# EAGLE board Bodacious Gogo (EAGLE 9.7.0)

Size 200.59 x 126.76 mm. Coordinates in mm from the lower left corner, seen from the top.
Outline: 0,0 200.59,0 200.59,126.76 0,126.76 0,0
Copper layers (1*16): Top 0.035mm / dielectric 1.5mm / Bottom 0.035mm
Design rules "default": minimum track width 6mil, minimum drill 0.35mm, track to track 6mil, track to pad 6mil, pad to pad 6mil, via to via 6mil, smd to smd 6mil, copper to edge 40mil, drill to drill 6mil, minimum pad ring 10mil, minimum via ring 8mil, stop-mask expansion 4mil, vias tented up to drill 0mil, thermal gap 10mil

## Footprints (pad centres in the part's own frame; a part is rotated, then mirrored left to right if it is on the bottom)
BATTERY-GENERIC = drill 1.118 pad 3.15 octagon: + 2.54,0; - -2.54,0
MOTOR = drill 1.118 pad 3.15 octagon: + 2.54,0; - -2.54,0
DIP762W53P254L1969H508Q16B = drill 0.743 pad 1.343: 1 -3.81,8.89; 2 -3.81,6.35; 3 -3.81,3.81; 4 -3.81,1.27; 5 -3.81,-1.27; 6 -3.81,-3.81; 7 -3.81,-6.35; 8 -3.81,-8.89; 9 3.81,-8.89; 10 3.81,-6.35; 11 3.81,-3.81; 12 3.81,-1.27; 13 3.81,1.27; 14 3.81,3.81; 15 3.81,6.35; 16 3.81,8.89
ARDUINO-UNO-R3-SHIELD = drill 1.016 pad 1.88: 3.3V 24.13,-2.54; 5V 24.13,0; A0 24.13,12.7; A1 24.13,15.24; A2 24.13,17.78; A3 24.13,20.32; A4 24.13,22.86; A5 24.13,25.4; AREF -24.13,-13.97; D2 -24.13,20.32; D3 -24.13,17.78; D4 -24.13,15.24; D5 -24.13,12.7; D6 -24.13,10.16; D7 -24.13,7.62; D8 -24.13,3.81; D9 -24.13,1.27; D10 -24.13,-1.27; D11 -24.13,-3.81; D12 -24.13,-6.35; D13 -24.13,-8.89; GND@0 24.13,2.54; GND@1 24.13,5.08; GND@2 -24.13,-11.43; IOREF 24.13,-7.62; NC 24.13,-10.16; RES 24.13,-5.08; RX -24.13,25.4; SCL -24.13,-19.05; SDA -24.13,-16.51; TX -24.13,22.86; VIN 24.13,7.62

## Placement (x,y rotation side)
BAT1  9V  [BATTERY-GENERIC]  162.01,118.51 0 top
M1  MOTOR_HDR  [MOTOR]  45.86,104.1 0 top
M2  MOTOR_HDR  [MOTOR]  45.86,67.74 0 top
M3  MOTOR_HDR  [MOTOR]  8.26,107.59 0 top
M4  MOTOR_HDR  [MOTOR]  9,67.24 0 top
U1  L293E  [DIP762W53P254L1969H508Q16B]  173,92.76 90 top
U2  L293E  [DIP762W53P254L1969H508Q16B]  146.11,91.26 90 top
U3  ARDUINO-UNO-R3-SHIELD  [ARDUINO-UNO-R3-SHIELD]  166.07,29.84 270 top

## Library data of the parts
BAT1 M1-M4 U1-U3 = Tinkercad

## Nets
BAT1+: BAT1.+ U1.1 U1.8 U1.9 U1.16 U2.1 U2.8 U2.9 U2.16 U3.5V
BAT1-: BAT1.- U1.4 U1.5 U1.12 U1.13 U2.4 U2.5 U2.12 U2.13 U3.GND@0 U3.GND@1 U3.GND@2
M1_+: M1.+ U2.3
M1_-: M1.- U2.6
M2_+: M2.+ U1.3
M2_-: M2.- U1.6
M3_+: M3.+ U2.11
M3_-: M3.- U2.14
M4_+: M4.+ U1.11
M4_-: M4.- U1.14
U3_D2: U1.2 U3.D2
U3_D3: U1.7 U3.D3
U3_D4: U1.10 U3.D4
U3_D5: U1.15 U3.D5
U3_D6: U2.2 U3.D6
U3_D7: U2.7 U3.D7
U3_D8: U2.10 U3.D8
U3_D11: U2.15 U3.D11

## Tracks (layer width: path | path; a pad name or v marks a point on that pad's centre or on a via)
BAT1+  (9 unrouted)
BAT1-  (11 unrouted)
M1_+  (1 unrouted)
M1_-  (1 unrouted)
M2_+  (1 unrouted)
M2_-  (1 unrouted)
M3_+  (1 unrouted)
M3_-  (1 unrouted)
M4_+  (1 unrouted)
M4_-  (1 unrouted)
U3_D2  (1 unrouted)
U3_D3  (1 unrouted)
U3_D4  (1 unrouted)
U3_D5  (1 unrouted)
U3_D6  (1 unrouted)
U3_D7  (1 unrouted)
U3_D8  (1 unrouted)
U3_D11  (1 unrouted)